# Altium PCB PCB1.PcbDoc
Units mil, origin at the board's own origin, x right, y up, seen from the top; angles counter-clockwise.
Board outline 2890.03 x 3510.03 mil, 2 copper layers (Top Layer, Bottom Layer), stack 61.756 mil thick; 36 components, 33 nets, 125 pads, 336 vias.
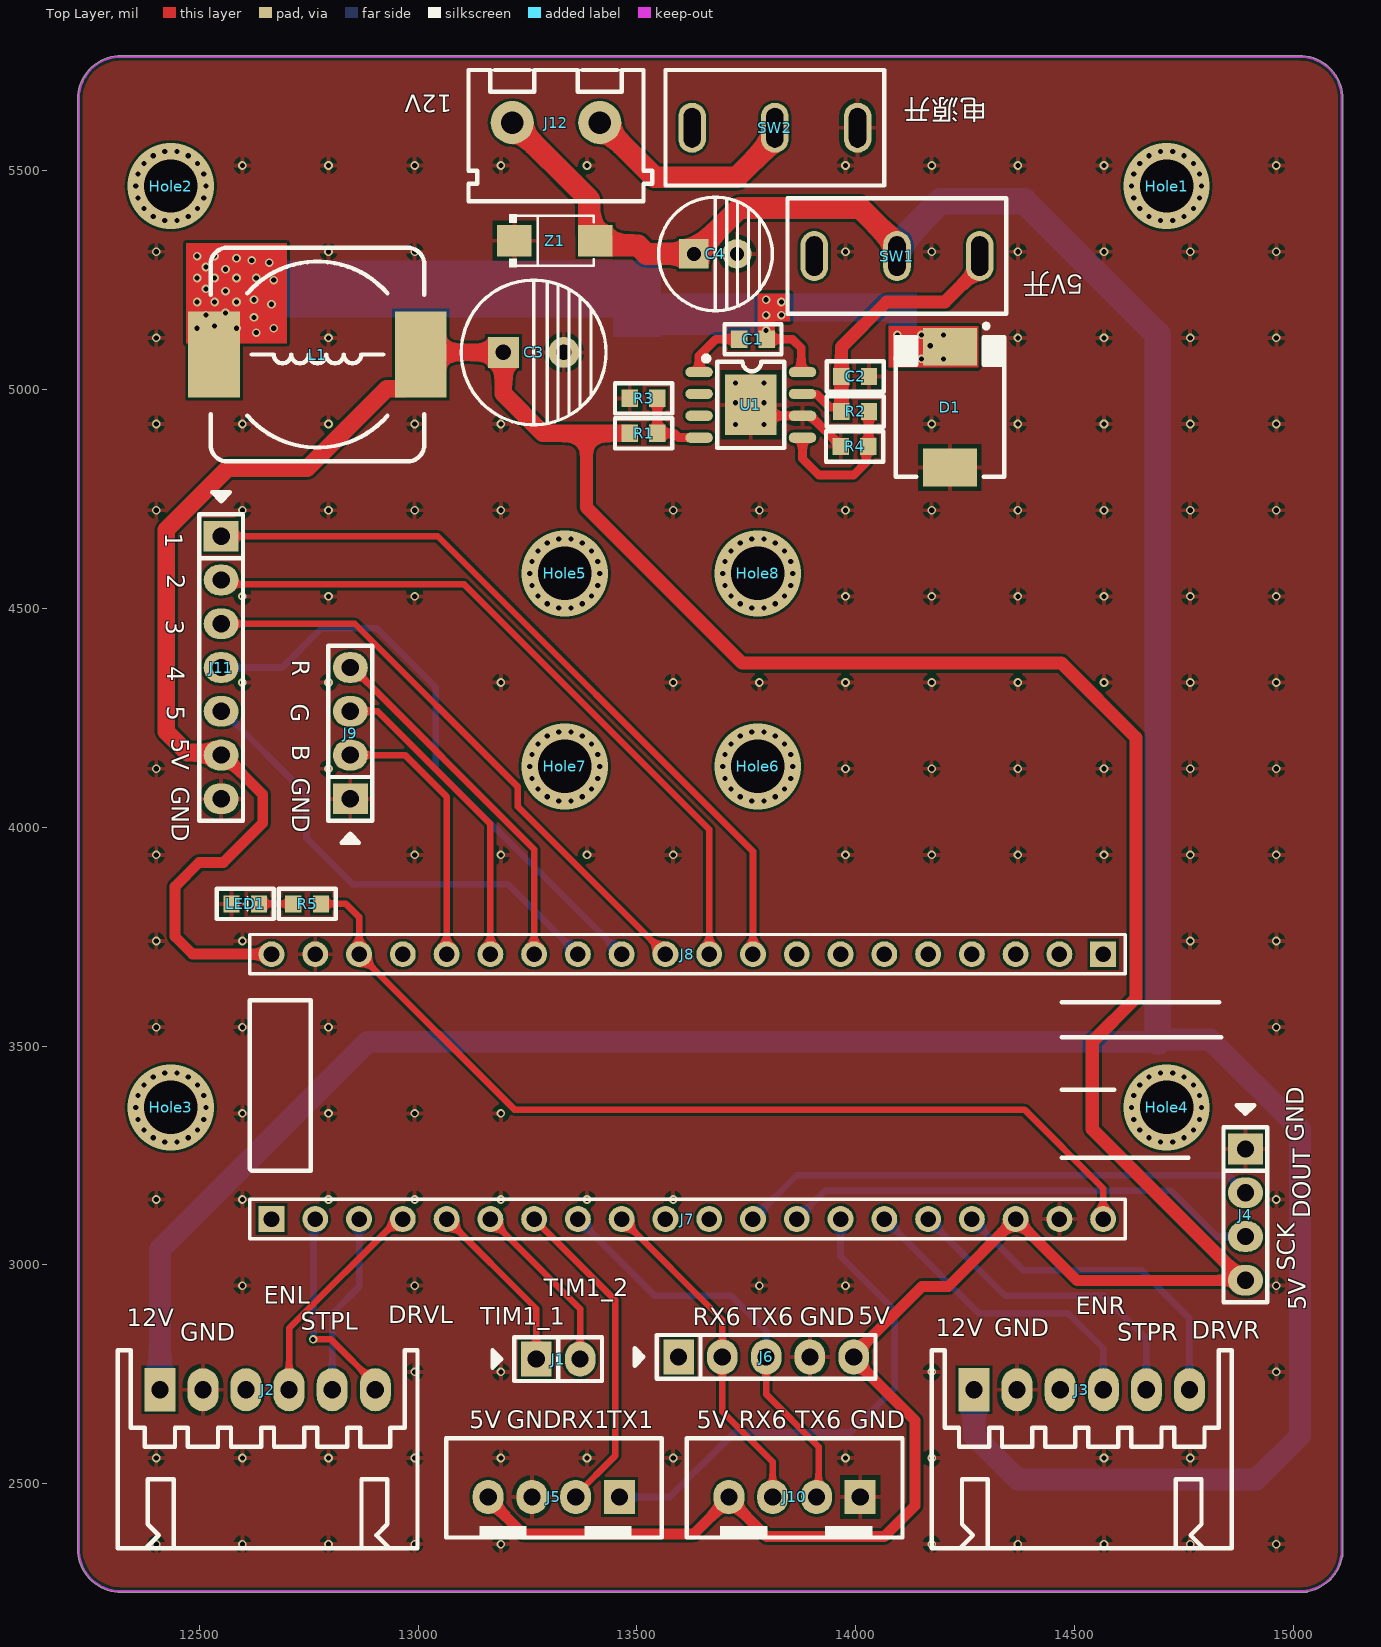
[diagram p0: Top Layer view]
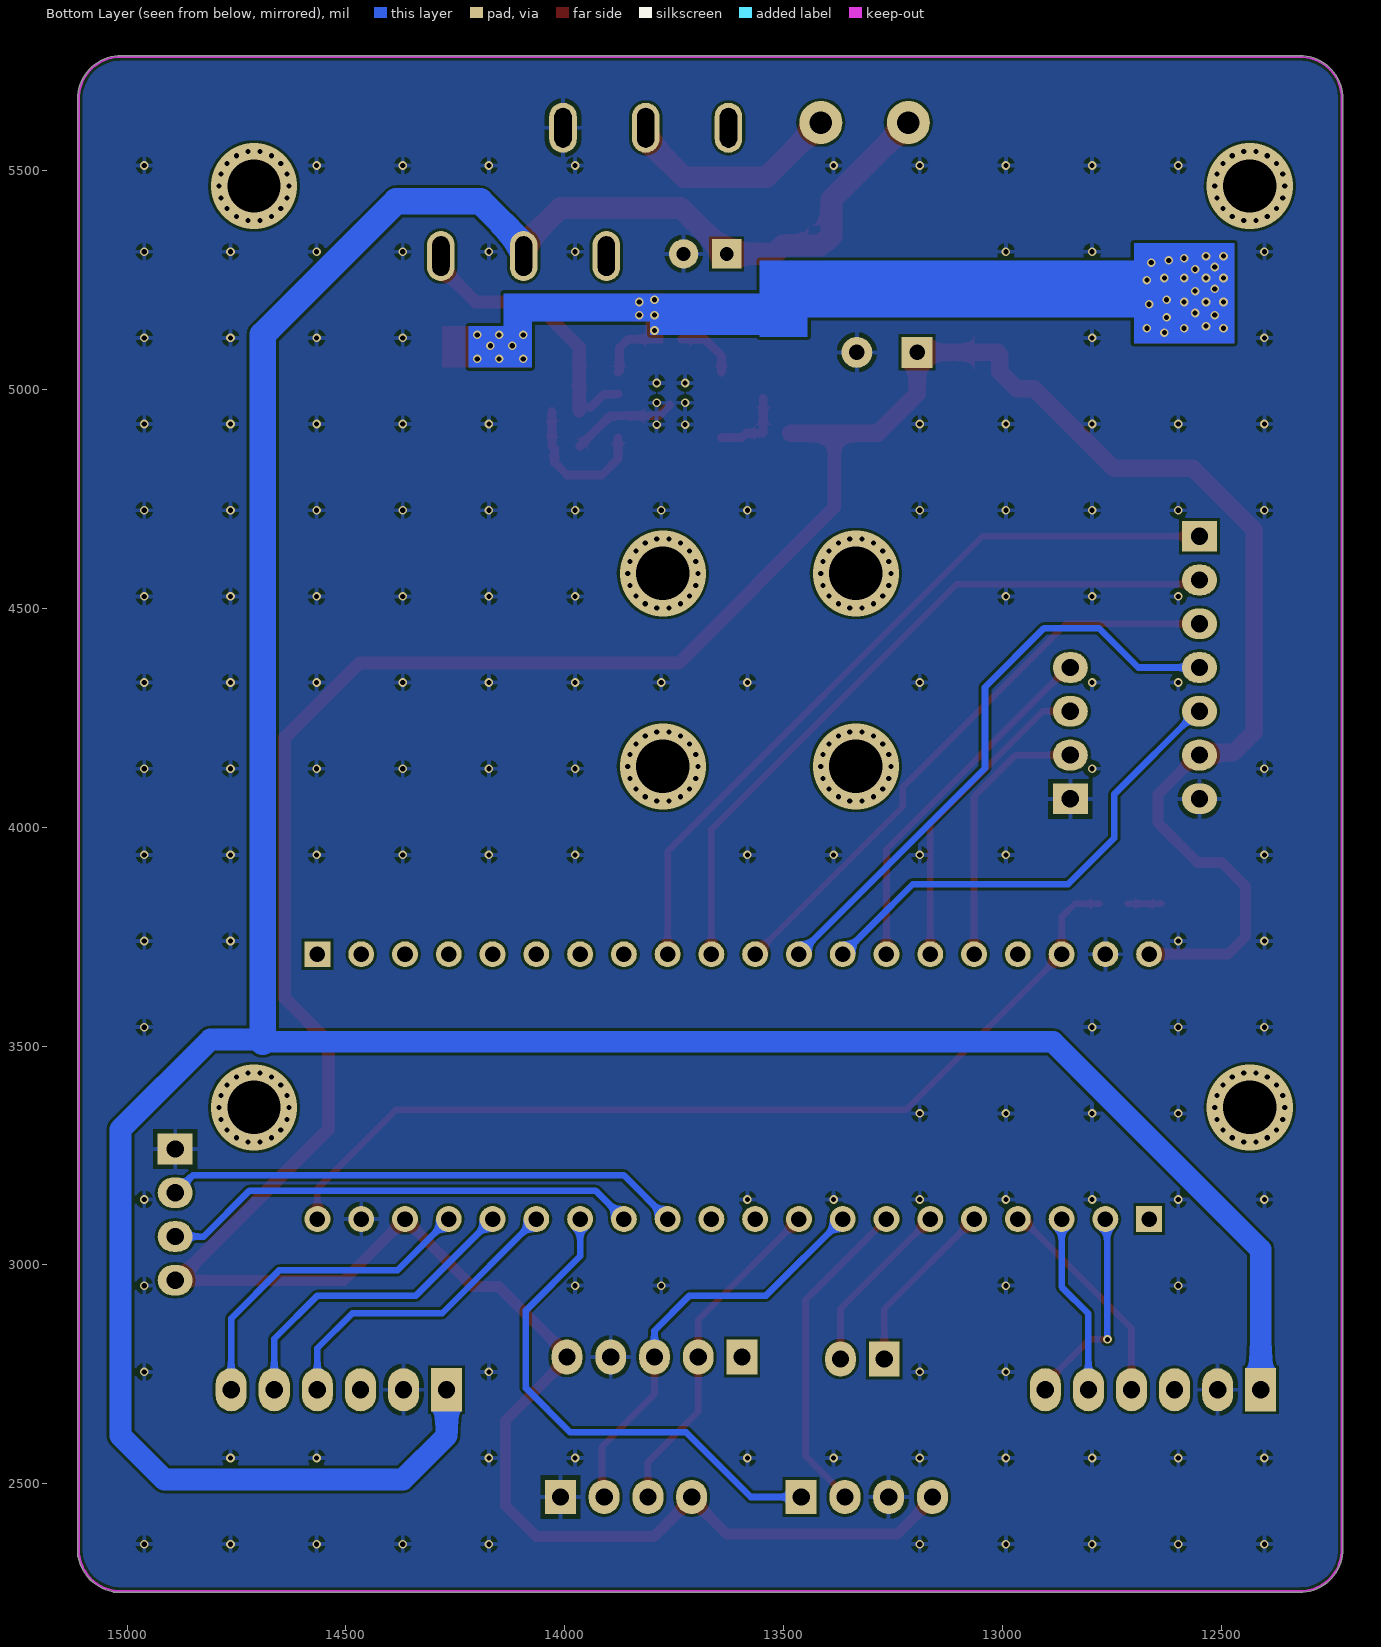
[diagram p1: Bottom Layer view, seen from below]
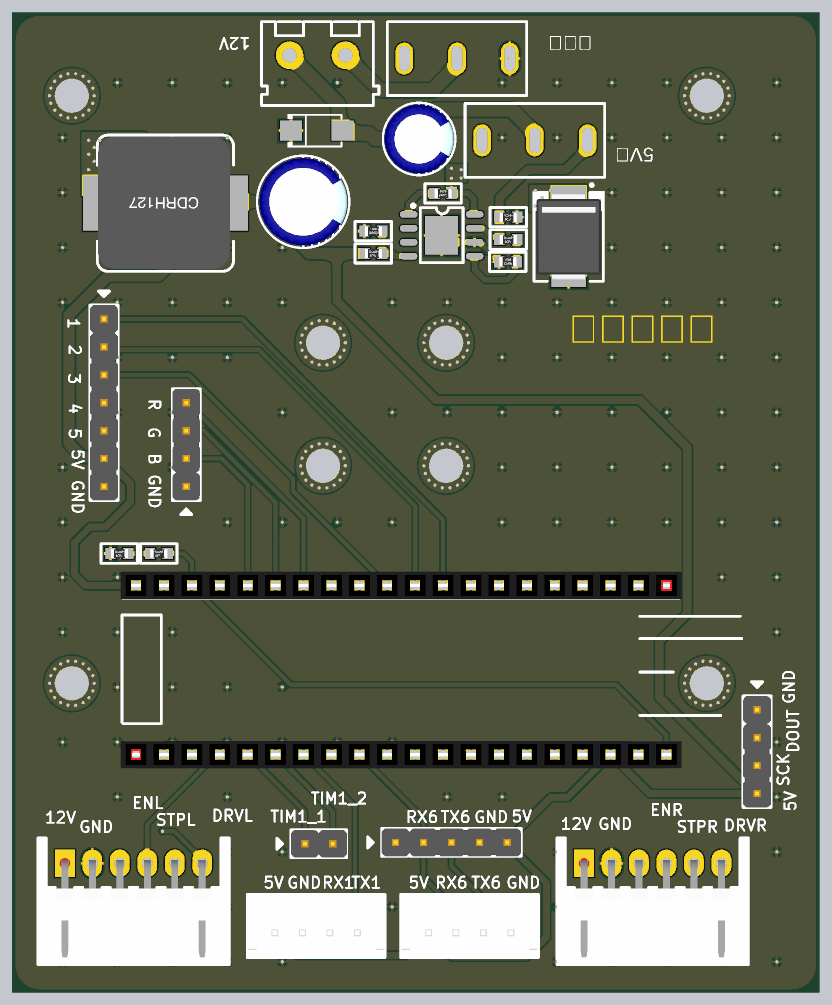
[diagram p2: 3D render of the assembled board from above, using the file's embedded part models]

## Layer stack, top to bottom
Top Solder: solder mask 1, SM-001, Dk 4
Top Layer: signal copper 1.378
Dielectric 1: core 59, Core-043, Dk 4.3
Bottom Layer: signal copper 1.378
Bottom Solder: solder mask 1, SM-001, Dk 4

## Board outline
12222.49,2345 ccw(c12225,2345) 12222.67,2344.06 ccw(c12320,2350) 12314.06,2252.67 ccw(c12315,2255) 12315,2252.49 15030,2252.49 ccw(c15030,2255) 15032.32,2254.04 ccw(c15015,2350) 15110.96,2332.68 ccw(c15110,2335) 15112.51,2335 15112.51,5670 ccw(c15110,5670) 15112.33,5670.94 ccw(c15015,5665) 15020.94,5762.33 ccw(c15020,5760) 15020,5762.52 12315,5762.52 ccw(c12315,5760) 12314.06,5762.33 ccw(c12320,5665) 12222.67,5670.94 ccw(c12225,5670) 12222.49,5670

## Design rules (kind name [scope] priority, off if disabled: settings)
Clearance [All] p1: gap=6 ignorepadtopadclearanceinfootprint=FALSE except(0: Arc-Hole Track-Hole SMDPad-Hole THPad-Hole Via-Hole Fill-Hole Poly-Hole Region-Hole Text-Hole)
PolygonConnect [All] p1: connectstyle=Relief reliefconductorwidth=10 reliefentries=4 polygonreliefangle="90 Angle" airgapwidth=10
RoutingVias [All] p1: holewidth=11.81 width=19.68 viastyle="Through Hole" minholewidth=11.81 minwidth=19.68 maxholewidth=3897.64 maxwidth=3897.64
SolderMaskExpansion [All] p1: expansion=4 istentingtop=FALSE
Width [All] p1: maxlimit=99 minlimit=8 preferedwidth=10
30 further rules are at their usual default settings.

## Components (designator, comment, footprint, x,y, rotation, side; value= is the part's Value field where it differs from the comment)
C1 "10NF" 0603 13765,5115 r0 top
C2 "10UF" 0603 13998.5,5030 r180 top
C3 "220UF" DIP-EC3.5X8X11.5 13195,5085 r0 top
C4 "100UF" DIP-EC2.5X6.3X11.2 13630,5310 r0 top
D1 "B540C" SMC 14215,4960 r90 top
Hole1 "3mmVias" 3mm 14710,5465 r0 top
Hole2 "3mmVias" 3mm 12435,5465 r0 top
Hole3 "3mmVias" 3mm 12435,3360 r0 top
Hole4 "3mmVias" 3mm 14710,3360 r0 top
Hole5 "3mmVias" 3mm 13335,4580 r0 top
Hole6 "3mmVias" 3mm 13775.94,4139.06 r0 top
Hole7 "3mmVias" 3mm 13335,4139.06 r0 top
Hole8 "3mmVias" 3mm 13775.94,4580 r0 top
J1 "HDR1x2" PIN-2-2.54-1.0 13320,2785 r0 top
J2 "HDR1x6" XH6/2.54mm/90 12615,2550 r0 top
J3 "HDR1x6" XH6/2.54mm/90 14475,2550 r0 top
J4 "HDR1x4" PIN-4-2.54-1.0 14890,3115 r270 top
J5 "HDR1x4" XH4/2.54mm/180 13275,2480 r180 top
J6 "HDR1x5" PIN-5-2.54-1.0 13795,2790 r0 top
J7 "HDR1x20" Fe-HDR1X20/2.54-S 12665,3105 r0 top
J8 "HDR1x20" Fe-HDR1X20/2.54-S 14565,3710 r180 top
J9 "HDR1x4" PIN-4-2.54-1.0 12845,4215 r90 top
J10 "HDR1x4" XH4/2.54mm/180 13825,2480 r180 top
J11 "HDR1x7" PIN-7-2.54-1.0 12550,4365 r270 top
J12 "HDR1x2" KF301 13325,5580 r180 top
L1 "22UH" CDRH127 12770,5080 r180 top
LED1 "LED0" 0603-led 12605,3825 r180 top
R1 "10K" 0603 13515,4900 r180 top
R2 "10K" 0603 13998.5,4950 r180 top
R3 "3.24K" 0603 13515,4980 r0 top
R4 "5K" 0603 13997.01,4870 r0 top
R5 "2.2K" 0603 12746.5,3825 r180 top
SW1 "SWITCH-SPST" ss12d10 14095.51,5307.05 r0 top
SW2 "SWITCH-SPST" ss12d10 13816.53,5600.16 r0 top
U1 "TPS5450" TPS5450 13760,4965 r270 top
Z1 "Diode" 1N5824 13311.59,5339.91 r0 top

## Footprints (in the part's own frame and the unit in brackets; to place one, negate y for a bottom-side part, rotate by r counter-clockwise, add the part's x,y. Pads: shape width x height; smd on the part's side, far side on the other; paste and mask are expansions set on the pad)
1N5824 [mm]
  rect 2x1.8 smd: 1(-2.327,0.002) 2(2.373,0.002)
  silkscreen extent -2.63,-1.52 2.27,1.53
3mm [mil]
0603 [mm] "SMD, 0603"
  rect 0.95x1 smd: 1(-0.8,0) 2(0.8,0)
  silkscreen extent -1.66,-0.88 1.66,0.88, body extent -0.77,-0.43 0.77,0.43, height 0.45
0603-led [mm] "SMD, 0603"
  rect 0.95x1 smd: 1(-0.8,0) 2(0.8,0)
  silkscreen extent -1.66,-0.88 1.66,0.88, body extent -0.77,-0.43 0.77,0.43, height 0.45
CDRH127 [mm] "12*12*8mm（长宽高）"
  rect 3x5 smd: 1(-6,0) 2(6,0)
  silkscreen extent -6.2,-6.2 6.2,6.2, body extent -5.87,-6.03 6.13,5.97, height 7.8
DIP-EC2.5X6.3X11.2 [mm]
  rect 1.7x1.7 hole 0.8: 1(0,0)
  round 1.7 hole 0.8: 2(2.5,0)
  silkscreen extent -2.05,-3.3 4.55,3.3, body extent -1.91,-3.15 4.41,3.15, height 11.23
DIP-EC3.5X8X11.5 [mm]
  rect 1.8x1.8 hole 0.9: 1(0,0)
  round 1.8 hole 0.9: 2(3.5,0)
  silkscreen extent -2.45,-4.2 5.95,4.2, body extent -2.25,-4 5.75,4, height 11.53
Fe-HDR1X20/2.54-S [mm]
  rect 1.5x1.5 hole 0.9: 1(0,0)
  round 1.5 hole 0.9: 2(2.54,0) 3(5.08,0) 4(7.62,0) 5(10.16,0) 6(12.7,0) 7(15.24,0) 8(17.78,0) 9(20.32,0) 10(22.86,0) 11(25.4,0) 12(27.94,0) 13(30.48,0) 14(33.02,0) 15(35.56,0) 16(38.1,0) 17(40.64,0) 18(43.18,0) 19(45.72,0) 20(48.26,0)
  silkscreen extent -1.27,-1.14 49.53,1.14, body extent -1.4,-1.27 49.65,1.23, height 2.74
KF301 [mil]
  round 98.42 hole 51.18: 1(-90,-30) 2(110,-30)
  silkscreen extent -210,-150 210,150
PIN-2-2.54-1.0 [mil] "Pin Header"
  rect 70x80 hole 39.37: 1(-50,0)
  oval 70x80 hole 39.37: 2(50,0)
  silkscreen extent -150,-50 100,50, body extent -100,-50 100,50, height 398
PIN-4-2.54-1.0 [mil] "Pin Header"
  rect 70x80 hole 39.37: 1(-150,0)
  oval 70x80 hole 39.37: 2(-50,0) 3(50,0) 4(150,0)
  silkscreen extent -250,-50 200,50, body extent -200,-50 200,50, height 398
PIN-5-2.54-1.0 [mil] "Pin Header"
  rect 70x80 hole 39.37: 1(-200,0)
  oval 70x80 hole 39.37: 2(-100,0) 3(0,0) 4(100,0) 5(200,0)
  silkscreen extent -300,-50 250,50, body extent -250,-50 250,50, height 398
PIN-7-2.54-1.0 [mil] "Pin Header"
  rect 70x80 hole 39.37: 1(-300,0)
  oval 70x80 hole 39.37: 2(-200,0) 3(-100,0) 4(0,0) 5(100,0) 6(200,0) 7(300,0)
  silkscreen extent -400,-50 350,50, body extent -350,-50 350,50, height 398
SMC [mm] "DO-214AB"
  rect 2.2x3.15 smd: 1(-3.5,0) 2(3.5,0)
  silkscreen extent -4.05,-3.15 4.83,3.15, body extent -3.95,-2.95 3.95,2.95, height 2.67
ss12d10 [mm]
  oval 1.6x2.9 hole 1 slot 2.3 at 90 deg: 1(-4.839,-0.052) 2(-0.039,-0.052) 3(4.761,-0.052)
  silkscreen extent -6.39,-3.4 6.31,3.3
TPS5450 [mm]
  oval 0.6x1.6 smd: 1(-1.905,-3) 2(-0.635,-3) 3(0.635,-3) 4(1.905,-3) 5(1.905,3) 6(0.635,3) 7(-0.635,3) 8(-1.905,3)
  rect 3.5x3 smd: 9(0,0)
  silkscreen extent -2.84,-2.74 2.5,1.95
XH4/2.54mm/180 [mm]
  rect 1.8x2 hole 1: 1(-4.699,0.254)
  oval 1.8x2 hole 1: 2(-2.159,0.254) 3(0.381,0.254) 4(2.921,0.254)
  silkscreen extent -7.15,-3.15 5.37,2.6, body extent -7.09,-3.05 5.31,2.7, height 7
XH6/2.54mm/90 [mm]
  rect 1.8x2.5 hole 1: 1(-5.207,4.191)
  oval 1.8x2.5 hole 1: 2(-2.707,4.191) 3(-0.207,4.191) 4(2.293,4.191) 5(4.793,4.191) 6(7.293,4.191)
  silkscreen extent -7.66,-5.01 9.74,6.49, body extent -7.66,-5.01 9.74,6.49, height 6.1

## Part data
C1 C2: library part CAP, "Capacitor"
C3 C4: library part CAP-TANTALUM, "Tantalum Capacitor"
D1: library part SS5x, "Schottky Diode"
J1 J2 J3 J4 J5 J6 J7 J8 J9 J10 J11 J12: "Connector"
L1: library part INDUCTANCE, "Inductance"
LED1: "Typical INFRARED GaAs LED", LatestRevisionDate=08-Jul-2005, LatestRevisionNote="Mech Layer 1 removed.", PackageDescription="LED; 2 Leads", PackageReference=LED-0, Published=8-Jun-2000, Publisher="Altium Limited"
R1 R2 R3 R4 R5: library part RES, "Resistor"
SW1 SW2: "Switch"
Z1: "Zener Diode"

## Via types
v1: diameter 19.68, hole 11.81, Top Layer to Bottom Layer, tented both sides, 328 vias
v2: diameter 196.85, hole 122.05, Top Layer to Bottom Layer, tented both sides, 8 vias

## Nets (pads, with @x,y where several pads share a name; then routed paths per layer and width w, separated by ;. In a path a pad name is that pad's centre, name@x,y a point inside that pad or via, vN(x,y) a via of type N, cw(c..) or ccw(c..) an arc to the next point about the centre after c; other vN are vias at no path point)
3V3: J7.20 J8.18 R5.1 | length 2176
  Top Layer w15: R5.1 12835,3825 12865,3795 J8.18 13220,3355 14385,3355 14565,3175 J7.20
5V: C3.1 J4.4 J5.4 J6.5 J7.18 J8.20 J10.4 J11.6 L1.1 R1.2 | length 8465.4
  Top Layer w25: J11.6 12555,4165 12645,4075 12645,4010 12555,3920 12500,3920 12445,3865 12445,3750 12485,3710 J8.20 ; J5.4 13160,2466.06 13241.06,2385 13628.94,2385 J10.4@13710,2466.06 ; J10.4 J10.4@13710,2466.06 ; J4.4 14885,2965 14505,2965 J7.18 14211.05,2951.05 14151.05,2951.05 13995,2795 J6.5 13995,2785 14135,2645 14135,2450 14065,2380 13796.06,2380 J10.4@13710,2466.06
  Top Layer w30: 13384.25,4900 13384.25,4730.75 13740,4375 14470,4375 14640,4205 14640,3610 14540,3510 14540,3310 J4.4@14885,2965
  Top Layer w40: J11.6 12544.26,4170.74 12472.69,4170.74 12425,4218.43 12425,4680 12565,4820 12746.22,4820 12927.8,5001.57 12967.17,5001.57 13006.22,5040.63 L1.1 13011.22,5085 C3.1 13195,4990 13285,4900 13384.25,4900 R1.2
12V: C4.1 J2.1 J3.1 J12.2 SW1.2 Z1.2 | length 8400.1
  Top Layer w50: J12.2 13390.63,5434.37 13390.63,5350.43 13401.06,5340 Z1.2 13415.43,5329.57 13501.97,5329.57 13521.54,5310 C4.1 13735,5415 14009.57,5415 14093.98,5330.59 SW1.2
  Bottom Layer w50: J2.1 12410,3035 12885,3510 14690,3510 ; J3.1 14270,2610 14370,2510 14915,2510 15015,2610 15015,3310 14810,3515 14690,3515
  Bottom Layer w60: SW1.2 14093.98,5330.59 14193.39,5430 14385,5430 14690,5125 14690,3515 14690,3510
BLUE_B2: J8.16 J9.2 | length 619.4
  Top Layer w15: J9.2 12970,4165 13065,4070 J8.16
DIR_L_B13: J2.6 J7.2 | length 474.9
  Top Layer w15: v1(12760,2830) 12800.91,2830 12902.13,2728.78 J2.6
  Bottom Layer w15: v1(12760,2830) 12760.9,2830.9 12760.9,3100.9 J7.2
DRV_R_B9: J3.6 J7.17 | length 754.1
  Bottom Layer w15: J7.17 14381.71,2988.29 14651.71,2988.29 14762.13,2877.87 J3.6
EN_L_B15: J2.4 J7.4 | length 503.4
  Top Layer w15: J2.4 12705.28,2855.28 12955,3105 J7.4
EN_R_B7: J3.4 J7.15 | length 717.3
  Bottom Layer w15: J7.15 14280,2890 14485,2890 14565.28,2809.72 J3.4
GND: C2.1 C3.2 C4.2 D1.1 J2.2 J3.2 J4.1 J5.3 J6.4 J7.19 J8.19 J9.1 J10.1 J11.7 LED1.2 R3.1 R4.1 SW2.3 U1.6 U1.9 Z1.1 | length 245.6
  Top Layer w20: U1.9 13785,4940 U1.6 13896.81,4940 13898.49,4938.33 13898.49,4938.01 13965.51,4870.98 R4.1
  other v1: 12401.58,2362.2 12598.43,2362.2 12795.28,2362.2 12992.13,2362.2 13188.98,2362.2 14173.23,2362.2 14370.08,2362.2 14566.93,2362.2 14763.78,2362.2 14960.63,2362.2 12401.58,2559.06 12598.43,2559.06 12795.28,2559.06 12992.13,2559.06 13188.98,2559.06 13385.83,2559.06 13582.68,2559.06 13976.38,2559.06 14173.23,2559.06 14566.93,2559.06 14763.78,2559.06 12992.13,2755.91 13188.98,2755.91 14173.23,2755.91 14960.63,2755.91 12598.43,2952.76 12992.13,2952.76 13779.53,2952.76 13976.38,2952.76 14960.63,2952.76 12401.58,3149.61 12598.43,3149.61 12795.28,3149.61 12992.13,3149.61 13188.98,3149.61 13385.83,3149.61 13582.68,3149.61 14960.63,3149.61 12598.43,3346.46 12795.28,3346.46 12992.13,3346.46 13188.98,3346.46 12401.58,3543.31 12598.43,3543.31 12795.28,3543.31 14960.63,3543.31 12401.58,3740.16 12598.43,3740.16 14763.78,3740.16 14960.63,3740.16 12401.58,3937.01 12992.13,3937.01 13188.98,3937.01 13385.83,3937.01 13582.68,3937.01 13976.38,3937.01 14173.23,3937.01 14370.08,3937.01 14566.93,3937.01 14763.78,3937.01 14960.63,3937.01 12401.58,4133.86 12795.28,4133.86 13976.38,4133.86 14173.23,4133.86 14370.08,4133.86 14566.93,4133.86 14763.78,4133.86 14960.63,4133.86 12598.43,4330.71 12795.28,4330.71 13188.98,4330.71 13582.68,4330.71 13779.53,4330.71 13976.38,4330.71 14173.23,4330.71 14370.08,4330.71 14566.93,4330.71 14763.78,4330.71 14960.63,4330.71 12598.43,4527.56 12795.28,4527.56 12992.13,4527.56 13976.38,4527.56 14173.23,4527.56 14370.08,4527.56 14566.93,4527.56 14763.78,4527.56 14960.63,4527.56 12401.58,4724.41 12598.43,4724.41 12795.28,4724.41 12992.13,4724.41 13188.98,4724.41 13582.68,4724.41 13779.53,4724.41 13976.38,4724.41 14173.23,4724.41 14370.08,4724.41 14566.93,4724.41 14763.78,4724.41 14960.63,4724.41 13725,4920 13790,4920 12401.58,4921.26 12598.43,4921.26 12795.28,4921.26 12992.13,4921.26 13188.98,4921.26 14173.23,4921.26 14370.08,4921.26 14566.93,4921.26 14763.78,4921.26 14960.63,4921.26 13725,4970 13790,4970 13725,5015 13790,5015 12401.58,5118.11 12795.28,5118.11 14370.08,5118.11 14566.93,5118.11 14763.78,5118.11 14960.63,5118.11 12401.58,5314.96 12795.28,5314.96 12992.13,5314.96 13976.38,5314.96 14173.23,5314.96 14370.08,5314.96 14566.93,5314.96 14763.78,5314.96 14960.63,5314.96 12598.43,5511.81 12795.28,5511.81 12992.13,5511.81 13188.98,5511.81 13385.83,5511.81 13976.38,5511.81 14173.23,5511.81 14370.08,5511.81 14566.93,5511.81 14960.63,5511.81
GRAY_1_A3: J8.9 J11.1 | length 1748.2
  Top Layer w15: J11.1 13045,4665 13765,3945 J8.9
GRAY_2_A4: J8.10 J11.2 | length 1636.1
  Top Layer w15: J11.2 12560,4555 13105,4555 13665,3995 J8.10
GRAY_3_A5: J8.11 J11.3 | length 1354.1
  Top Layer w15: J11.3 12855,4465 13227.88,4092.12 13227.88,4047.12 J8.11
GRAY_4_A6: J8.12 J11.4 | length 1369.2
  Bottom Layer w15: J11.4 12690,4365 12780,4455 12905,4455 13040,4320 13040,4135 J8.12
GRAY_5_A7: J8.13 J11.5 | length 1103.5
  Bottom Layer w15: J11.5 12555,4265 12745,4075 12745,3975 12850,3870 13205,3870 13298.29,3776.71 J8.13
GREEN_B1: J8.15 J9.3 | length 724.2
  Top Layer w15: J9.3 12907.5,4265 13165,4007.5 J8.15
H_DOUT_B4: J4.2 J7.12 | length 1183
  Bottom Layer w15: J7.12 13865,3205 14850,3205 J4.2
H_SCK_B5: J4.3 J7.13 | length 1095.4
  Bottom Layer w15: J7.13 13930,3170 14720,3170 14825,3065 J4.3
NetC1_1: C1.1 U1.1 | length 144.3
  Top Layer w20: U1.1 13641.89,5076.89 13680,5115 C1.1
NetC1_2: C1.2 D1.2 L1.2 U1.8 | length 143.9
  Top Layer w20: C1.2 13855,5115 13875,5095 13875,5041.67 13876.67,5040 U1.8
  other v1: 14095,5070 14150,5070 14200,5070 14120,5100 14170,5100 14095,5125 14150,5125 14200,5125 12630,5130 13795,5135 12495,5140 12585,5140 12670,5140 12535,5145 12625,5165 12515,5170 13795,5170 13830,5170 12560,5175 12665,5195 12495,5200 12535,5200 12585,5200 13830,5200 12625,5205 13795,5205 12560,5225 12515,5230 12670,5250 12495,5255 12535,5255 12585,5255 12630,5255 12560,5275 12515,5280 12660,5290 12620,5295 12585,5300 12495,5305 12535,5305
NetC2_2: C2.2 R2.2 SW1.3 U1.7 | length 669.2
  Top Layer w20: U1.7 13878.8,4989.31 13910.69,4989.31 13940.32,4959.69 13958.31,4959.69 13967.01,4950.98 R2.2
  Top Layer w30: R2.2@13967.01,4950.98 C2.2 13967.01,5097.01 14070,5200 14203.54,5200 14282.95,5279.41 SW1.3
NetJ12_1: J12.1 SW2.2 | length 513.6
  Top Layer w50: J12.1 13540,5485 13727.48,5485 13815,5572.52 SW2.2
NetLED1_1: LED1.1 R5.2 | length 78.5
  Top Layer w15: LED1.1 R5.2
NetR1_1: R1.1 R3.2 U1.4 | length 179.5
  Top Layer w20: R3.2 R1.1 13585,4900 13594.31,4890.69 13641.2,4890.69 U1.4
NetR2_1: R2.1 R4.2 U1.5 | length 339.8
  Top Layer w20: U1.5 13878.11,4841.89 13915,4805 13995,4805 14023.6,4833.6 14023.6,4865.1 14029.25,4870.75 14029.25,4949.25 R2.1
RED_B0: J8.14 J9.4 | length 831.9
  Top Layer w15: J9.4 12850,4365 13265,3950 J8.14
STP_L_B14: J2.5 J7.3 | length 415.4
  Bottom Layer w15: J2.5 12803.7,2888.7 12865,2950 J7.3
STP_R_B8: J3.5 J7.16 | length 728.4
  Bottom Layer w15: J7.16 14340,2930 14565,2930 14663.7,2831.3 J3.5
TIM1_CH1_A8: J1.1 J7.5 | length 404.9
  Top Layer w15: J7.5 13270,2900 J1.1
TIM1_CH2_A9: J1.2 J7.6 | length 404.9
  Top Layer w15: J7.6 13370,2900 J1.2
UART1_RX_A10: J5.2 J7.7 | length 748.9
  Top Layer w15: J7.7 13450,2920 13450,2563.94 13360,2473.94 J5.2
UART6_RX_A12: J6.2 J7.9 J10.3 | length 777.9
  Top Layer w15: J7.9 13695,2875 J6.2 13695,2665 13810,2550 J10.3
UART6_TX_A11: J6.3 J7.8 J10.2 | length 967.4
  Top Layer w15: J6.3 13795,2705 13915,2585 13915,2475 J10.2
  Bottom Layer w15: J7.8 13540,2930 13715,2930 13795,2850 J6.3
USART1_TX_B6: J5.1 J7.14 | length 1169.3
  Bottom Layer w15: J5.1 13575,2470 13722.46,2617.46 13987.46,2617.46 14088.79,2718.79 14088.79,2896.21 13965,3020 J7.14
pads on no net: J2.3 J3.3 J6.1 J7.1 J7.10 J7.11 J8.1 J8.2 J8.3 J8.4 J8.5 J8.6 J8.7 J8.8 J8.17 SW1.1 SW2.1 U1.2 U1.3
copper on no net:
  other v1: 12421.11,3281.22 12448.89,3281.22 14696.11,3281.22 14723.89,3281.22 12395,3290.72 12475,3290.72 14670,3290.72 14750,3290.72 12373.72,3308.58 12496.28,3308.58 14648.72,3308.58 14771.28,3308.58 12359.82,3332.64 12510.18,3332.64 14634.82,3332.64 14785.18,3332.64 12355,3360 12515,3360 14630,3360 14790,3360 12359.82,3387.36 12510.18,3387.36 14634.82,3387.36 14785.18,3387.36 12373.72,3411.42 12496.28,3411.42 14648.72,3411.42 14771.28,3411.42 12395,3429.28 12475,3429.28 14670,3429.28 14750,3429.28 12421.11,3438.78 12448.89,3438.78 14696.11,3438.78 14723.89,3438.78 13321.11,4060.27 13348.89,4060.27 13762.05,4060.27 13789.84,4060.27 13295,4069.77 13375,4069.77 13735.94,4069.77 13815.94,4069.77 13273.72,4087.63 13396.28,4087.63 13714.66,4087.63 13837.23,4087.63 13259.82,4111.69 13410.18,4111.69 13700.77,4111.69 13851.12,4111.69 13255,4139.06 13415,4139.06 13695.94,4139.06 13855.94,4139.06 13259.82,4166.42 13410.18,4166.42 13700.77,4166.42 13851.12,4166.42 13273.72,4190.48 13396.28,4190.48 13714.66,4190.48 13837.23,4190.48 13295,4208.34 13375,4208.34 13735.94,4208.34 13815.94,4208.34 13321.11,4217.84 13348.89,4217.84 13762.05,4217.84 13789.84,4217.84 13321.11,4501.22 13348.89,4501.22 13762.05,4501.22 13789.84,4501.22 13295,4510.72 13375,4510.72 13735.94,4510.72 13815.94,4510.72 13273.72,4528.58 13396.28,4528.58 13714.66,4528.58 13837.23,4528.58 13259.82,4552.64 13410.18,4552.64 13700.77,4552.64 13851.12,4552.64 13255,4580 13415,4580 13695.94,4580 13855.94,4580 13259.82,4607.36 13410.18,4607.36 13700.77,4607.36 13851.12,4607.36 13273.72,4631.42 13396.28,4631.42 13714.66,4631.42 13837.23,4631.42 13295,4649.28 13375,4649.28 13735.94,4649.28 13815.94,4649.28 13321.11,4658.78 13348.89,4658.78 13762.05,4658.78 13789.84,4658.78 12421.11,5386.22 12448.89,5386.22 14696.11,5386.22 14723.89,5386.22 12395,5395.72 12475,5395.72 14670,5395.72 14750,5395.72 12373.72,5413.58 12496.28,5413.58 14648.72,5413.58 14771.28,5413.58 12359.82,5437.64 12510.18,5437.64 14634.82,5437.64 14785.18,5437.64 12355,5465 12515,5465 14630,5465 14790,5465 12359.82,5492.36 12510.18,5492.36 14634.82,5492.36 14785.18,5492.36 12373.72,5516.42 12496.28,5516.42 14648.72,5516.42 14771.28,5516.42 12395,5534.28 12475,5534.28 14670,5534.28 14750,5534.28 12421.11,5543.78 12448.89,5543.78 14696.11,5543.78 14723.89,5543.78
  other v2: 12435,3360 14710,3360 13335,4139.06 13775.94,4139.06 13335,4580 13775.94,4580 12435,5465 14710,5465

## Polygon pours and split planes (outlines as drawn)
GND on Top Layer "GND_L01_P000" (solid, remove dead copper, pour order 0): 11775,6240 11905,6110 16070,6110 16070,2555 15350,1835 15145,2040 11060,2040
GND on Bottom Layer "GND_L02_P001" (solid, remove dead copper, pour order 1): 11230,6235 15760,6235 15995,6000 15650,5655 15650,1530 11485,1530 11355,1660

## Keep-outs
Keep-Out Layer:
  lines w5: 12225,2345 12225,5670 ; 12225,5665 cw(c12320,5665) 12315.01,5759.87 ; 12225.13,2345.01 ccw(c12320,2350) 12320,2255 ; 12315,2255 15030,2255 ; 12315,5760 15020,5760 ; 15015,5760 cw(c15015,5665) 15109.87,5669.99 ; 15019.99,2255.13 ccw(c15015,2350) 15110,2350 ; 15110,2335 15110,5670

## Other copper
Top Layer:
  rectangle net NetC1_2: 12470,5105 12700,5335
  rectangle net NetC1_2: 13775,5155 13850,5220
  rectangle net NetC1_2: 13775,5105 13815,5220
  rectangle net NetC1_2: 14075,5050 14280,5145
Bottom Layer:
  rectangle net NetC1_2: 13485,5125 13805,5220
  rectangle net NetC1_2: 13445,5120 13555,5295
  rectangle net NetC1_2: 12645,5165 13555,5295
  rectangle net NetC1_2: 12470,5105 12700,5335
  rectangle net NetC1_2: 14075,5130 14140,5170
  rectangle net NetC1_2: 13825,5155 14140,5220
  rectangle net NetC1_2: 13775,5125 13805,5180
  rectangle net NetC1_2: 13775,5155 13850,5220
  rectangle net NetC1_2: 14075,5050 14220,5145

## Silkscreen, mask and mechanical layers (free items; w line width, h text height)
Top Overlay:
  lines w10: 14470,3245 14760,3245 ; 14470,3400 14590,3400 ; 14470,3520 14835,3520 ; 14470,3600 14830,3600 ; 12615,3220 12620,3215 12755,3215 12755,3605 12615,3605 12615,3220
  text "电源开" at 14300,5678.27 h80 r180
  text "12V" at 13078,5673 h40 r180
  text "5V开" at 14520,5278.27 h80 r180
  text "1" at 12422,4673 h40 r270
  text "2" at 12427,4578 h40 r270
  text "3" at 12424.55,4474.4 h40 r270
  text "R" at 12712,4383 h40 r270
  text "4" at 12427,4368 h40 r270
  text "G" at 12710.35,4282.36 h40 r270
  text "5" at 12427,4278 h40 r270
  text "5V" at 12437,4203 h40 r270
  text "B" at 12712,4188 h40 r270
  text "GND" at 12712,4113 h40 r270
  text "GND" at 12437,4093 h40 r270
  text "GND" at 15023,3282 h40 r90
  text "DOUT" at 15038,3107 h40 r90
  text "SCK" at 15003,2987 h40 r90
  text "TIM1_2" at 13287,2928.66 h40
  text "ENL" at 12647,2912 h40
  text "5V" at 15028,2897 h40 r90
  text "ENR" at 14502,2887 h40
  text "DRVL" at 12932,2867 h40
  text "TIM1_1" at 13142,2863.66 h40
  text "5V" at 14005.81,2864.3 h40
  text "RX6" at 13627,2862 h40
  text "TX6" at 13752,2862 h40
  text "GND" at 13872,2862 h40
  text "12V" at 12334.46,2859.96 h40
  text "STPL" at 12732,2852 h40
  text "12V" at 14182,2837 h40
  text "GND" at 14316.29,2836.82 h40
  text "DRVR" at 14767,2832 h40
  text "GND" at 12457,2827 h40
  text "STPR" at 14597,2827 h40
  text "5V" at 13117,2627 h40
  text "GND" at 13202,2627 h40
  text "RX1" at 13327,2627 h40
  text "TX1" at 13432,2627 h40
  text "5V" at 13637,2627 h40
  text "RX6" at 13732,2627 h40
  text "TX6" at 13862,2627 h40
  text "GND" at 13987,2627 h40
Top Solder:
  text "可靠性附魔" at 14215,4580.11 h160